# EAGLE board LedBoards (EAGLE 4.16)
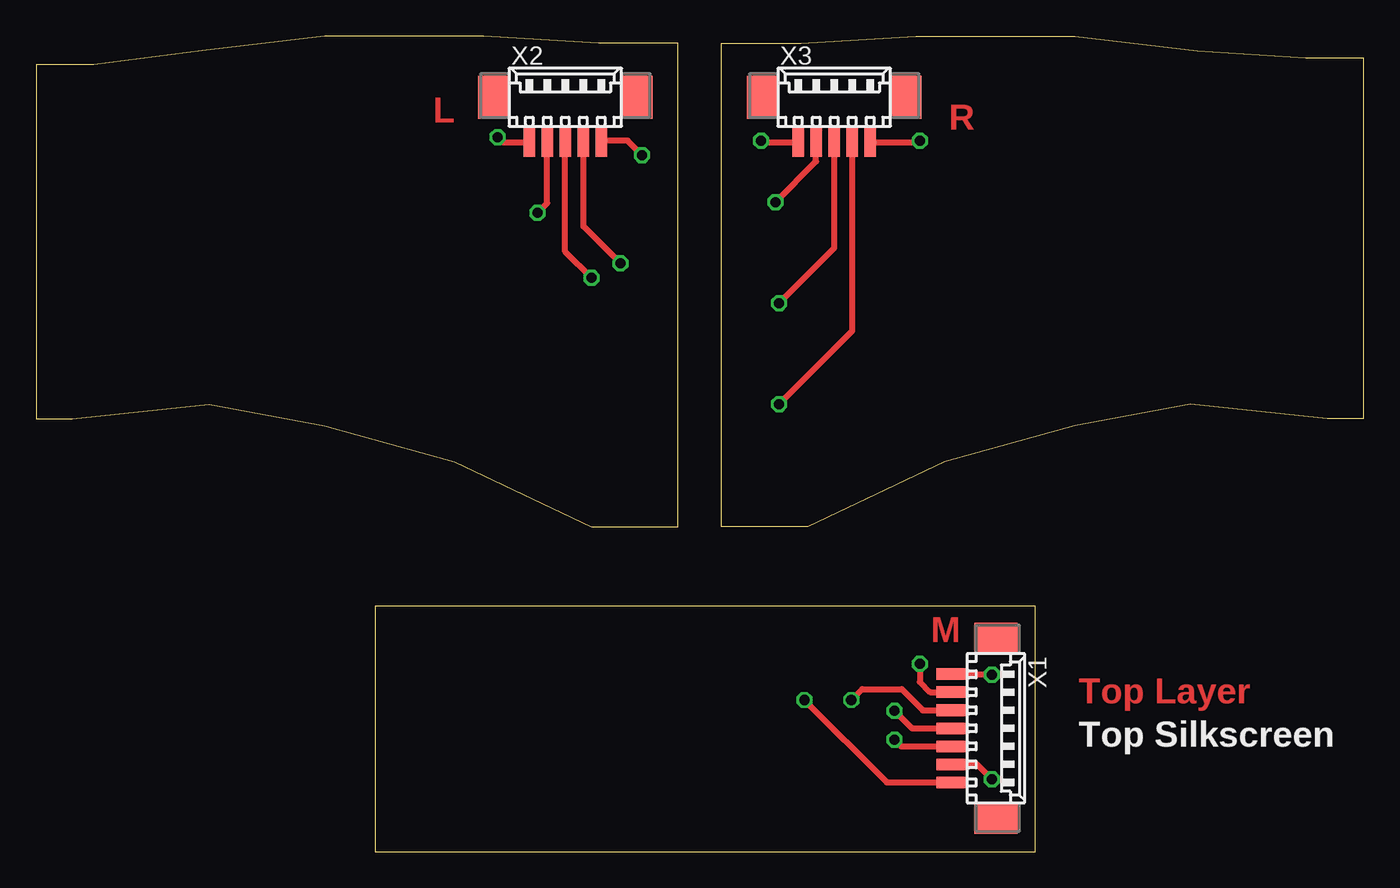
[diagram p0: board, top side]
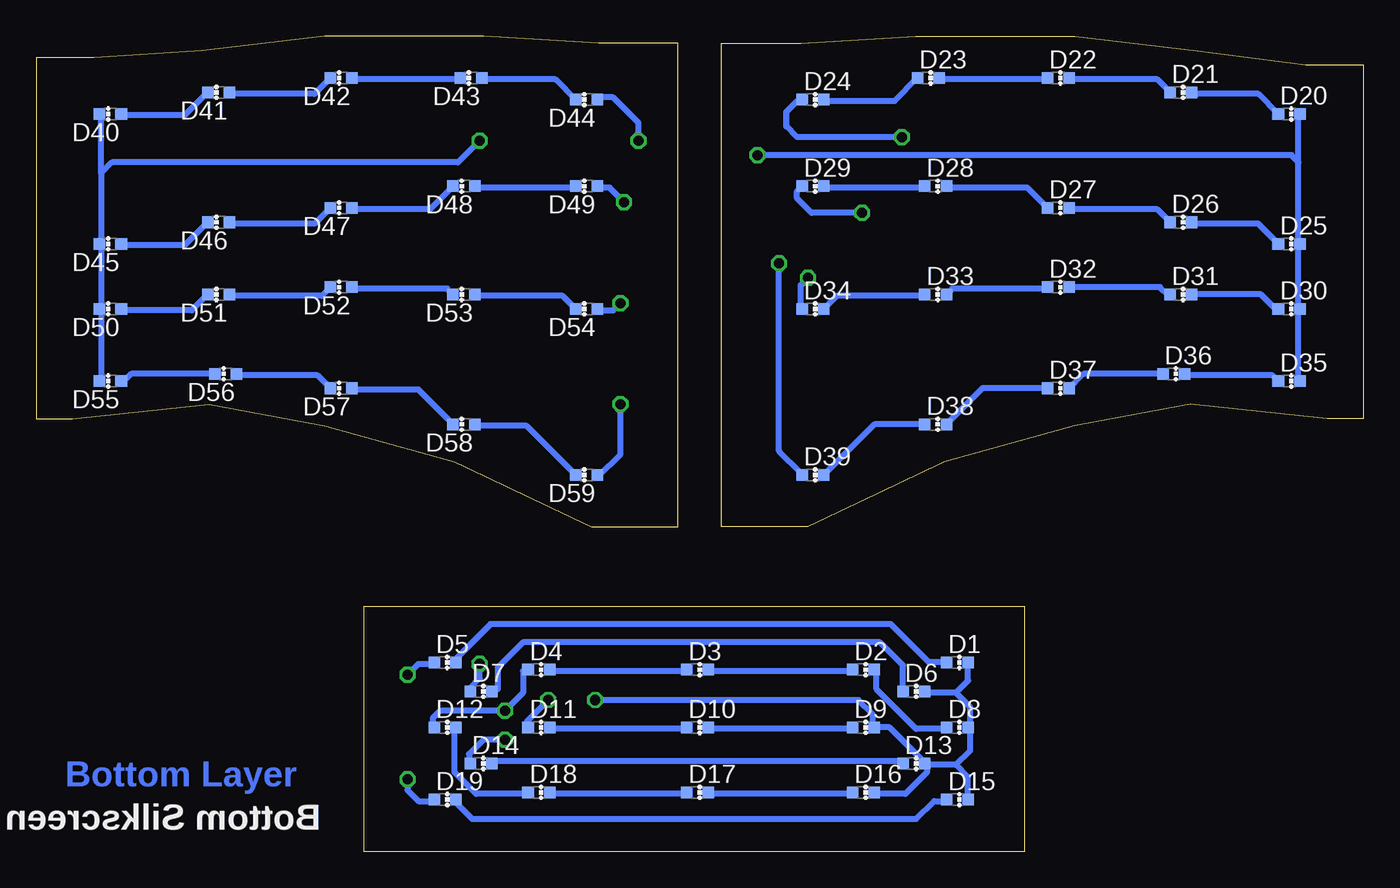
[diagram p1: board, bottom side, seen from below]

Size 92 x 56.5 mm. Coordinates in mm from the lower left corner, seen from the top.
Outline: 0,54.5 0,30 2.5,30 12,31 20,29.5 29,27 38.5,22.5 44.5,22.5 44.5,56 39,56 31,56.5 20,56.5 11.5,55.5 4,54.5 0,54.5
Outline: 92,55 92,30 89.5,30 80,31 72,29.5 63,27 53.5,22.5 47.5,22.5 47.5,56 53,56 61,56.5 72,56.5 80.5,55.5 88,55 92,55
Outline: 23.5,17 23.5,0 69.25,0 69.25,17 23.5,17
Copper layers (1*16): Top 0.035mm / dielectric 1.5mm / Bottom 0.035mm
Design rules "10mils": minimum track width 10mil, minimum drill 24mil, track to track 10mil, track to pad 10mil, pad to pad 10mil, via to via 10mil, smd to smd 10mil, copper to edge 40mil, drill to drill 10mil, minimum pad ring 10mil, minimum via ring 8mil, stop-mask expansion 0mil, vias tented up to drill 0mil, thermal gap 10mil

## Footprints (pad centres in the part's own frame; a part is rotated, then mirrored left to right if it is on the bottom)
CHIP-LED0603 = smd 0.8 x 0.8: A 0,-0.75; C 0,0.75
53261-07 = smd 0.8 x 2: 1 3.75,-2.5; 2 2.5,-2.5; 3 1.25,-2.5; 4 0,-2.5; 5 -1.25,-2.5; 6 -2.5,-2.5; 7 -3.75,-2.5 | smd 2.1 x 3: S1 6.25,0.625; S2 -6.25,0.625
53261-05 = smd 0.8 x 2: 1 2.5,-2.5; 2 1.25,-2.5; 3 0,-2.5; 4 -1.25,-2.5; 5 -2.5,-2.5 | smd 2.1 x 3: S1 5,0.625; S2 -5,0.625

## Placement (x,y rotation side)
D1  [CHIP-LED0603]  28.15,13.1 270 bottom
D2  [CHIP-LED0603]  34.65,12.6 270 bottom
D3  [CHIP-LED0603]  46.15,12.6 270 bottom
D4  [CHIP-LED0603]  57.15,12.6 270 bottom
D5  [CHIP-LED0603]  63.65,13.1 270 bottom
D6  [CHIP-LED0603]  31.15,11.1 270 bottom
D7  [CHIP-LED0603]  61.15,11.1 270 bottom
D8  [CHIP-LED0603]  28.15,8.6 270 bottom
D9  [CHIP-LED0603]  34.65,8.6 270 bottom
D10  [CHIP-LED0603]  46.15,8.6 270 bottom
D11  [CHIP-LED0603]  57.15,8.6 270 bottom
D12  [CHIP-LED0603]  63.65,8.6 270 bottom
D13  [CHIP-LED0603]  31.15,6.1 270 bottom
D14  [CHIP-LED0603]  61.15,6.1 270 bottom
D15  [CHIP-LED0603]  28.15,3.6 270 bottom
D16  [CHIP-LED0603]  34.65,4.1 270 bottom
D17  [CHIP-LED0603]  46.15,4.1 270 bottom
D18  [CHIP-LED0603]  57.15,4.1 270 bottom
D19  [CHIP-LED0603]  63.65,3.6 270 bottom
D20  [CHIP-LED0603]  5.15,51.1 270 bottom
D21  [CHIP-LED0603]  12.65,52.6 270 bottom
D22  [CHIP-LED0603]  21.15,53.6 270 bottom
D23  [CHIP-LED0603]  30.15,53.6 270 bottom
D24  [CHIP-LED0603]  38.15,52.1 270 bottom
D25  [CHIP-LED0603]  5.15,42.1 270 bottom
D26  [CHIP-LED0603]  12.65,43.6 270 bottom
D27  [CHIP-LED0603]  21.15,44.6 270 bottom
D28  [CHIP-LED0603]  29.65,46.1 270 bottom
D29  [CHIP-LED0603]  38.15,46.1 270 bottom
D30  [CHIP-LED0603]  5.15,37.6 270 bottom
D31  [CHIP-LED0603]  12.65,38.6 270 bottom
D32  [CHIP-LED0603]  21.15,39.1 270 bottom
D33  [CHIP-LED0603]  29.65,38.6 270 bottom
D34  [CHIP-LED0603]  38.15,37.6 270 bottom
D35  [CHIP-LED0603]  5.15,32.6 270 bottom
D36  [CHIP-LED0603]  13.15,33.1 270 bottom
D37  [CHIP-LED0603]  21.15,32.1 270 bottom
D38  [CHIP-LED0603]  29.65,29.6 270 bottom
D39  [CHIP-LED0603]  38.15,26.1 270 bottom
D40  [CHIP-LED0603]  86.85,51.1 90 bottom
D41  [CHIP-LED0603]  79.35,52.6 90 bottom
D42  [CHIP-LED0603]  70.85,53.6 90 bottom
D43  [CHIP-LED0603]  61.85,53.6 90 bottom
D44  [CHIP-LED0603]  53.85,52.1 90 bottom
D45  [CHIP-LED0603]  86.85,42.1 90 bottom
D46  [CHIP-LED0603]  79.35,43.6 90 bottom
D47  [CHIP-LED0603]  70.85,44.6 90 bottom
D48  [CHIP-LED0603]  62.35,46.1 90 bottom
D49  [CHIP-LED0603]  53.85,46.1 90 bottom
D50  [CHIP-LED0603]  86.85,37.6 90 bottom
D51  [CHIP-LED0603]  79.35,38.6 90 bottom
D52  [CHIP-LED0603]  70.85,39.1 90 bottom
D53  [CHIP-LED0603]  62.35,38.6 90 bottom
D54  [CHIP-LED0603]  53.85,37.6 90 bottom
D55  [CHIP-LED0603]  86.85,32.6 90 bottom
D56  [CHIP-LED0603]  78.85,33.1 90 bottom
D57  [CHIP-LED0603]  70.85,32.1 90 bottom
D58  [CHIP-LED0603]  62.35,29.6 90 bottom
D59  [CHIP-LED0603]  53.85,26.1 90 bottom
X1  Mouth connector  [53261-07]  65.91,8.54 270 top
X2  Right eye connector  [53261-05]  36.68,51.63 0 top
X3  Left eye connector  [53261-05]  55.32,51.63 0 top

## Library data of the parts
D1-D59 = led
X1-X3 = con-molex

## Nets
GND: D20.C D25.C D30.C D35.C X2.1
GND1: D1.C D6.C D8.C D9.C D13.C D15.C D16.C X1.1
GND2: D40.C D45.C D50.C D55.C X3.1
N$1: D44.A X3.5
N$2: D58.A D59.C
N$3: D57.A D58.C
N$4: D56.A D57.C
N$5: D24.A X2.5
N$6: D38.A D39.C
N$7: D37.A D38.C
N$8: D36.A D37.C
N$9: D35.A D36.C
N$10: D29.A X2.4
N$11: D33.A D34.C
N$12: D32.A D33.C
N$13: D17.A D18.C
N$14: D16.A D17.C
N$15: D12.C D18.A
N$16: D2.A D3.C
N$17: D3.A D4.C
N$18: D4.A D12.A X1.4
N$19: D31.A D32.C
N$20: D30.A D31.C
N$21: D39.A X2.2
N$22: D28.A D29.C
N$23: D27.A D28.C
N$24: D26.A D27.C
N$25: D25.A D26.C
N$26: D34.A X2.3
N$27: D23.A D24.C
N$28: D22.A D23.C
N$29: D21.A D22.C
N$30: D20.A D21.C
N$31: D55.A D56.C
N$32: D49.A X3.4
N$33: D53.A D54.C
N$34: D52.A D53.C
N$35: D51.A D52.C
N$36: D50.A D51.C
N$37: D54.A X3.3
N$38: D48.A D49.C
N$39: D47.A D48.C
N$40: D46.A D47.C
N$41: D45.A D46.C
N$42: D40.A D41.C
N$43: D41.A D42.C
N$44: D42.A D43.C
N$45: D59.A X3.2
N$46: D43.A D44.C
N$47: D2.C D8.A
N$48: D5.A X1.7
N$49: D6.A D7.C
N$50: D7.A X1.6
N$51: D1.A D5.C
N$52: D10.A D11.C
N$53: D19.A X1.2
N$54: D9.A D10.C
N$55: D14.A X1.3
N$56: D15.A D19.C
N$57: D11.A X1.5
N$58: D13.A D14.C

## Tracks (layer width: path | path; a pad name or v marks a point on that pad's centre or on a via)
GND  (via drill 0.7)
  Top 0.406: X2.1 39.25,49.2 39.25,49.25 41,49.25 v42,48.25
  Bottom 0.406: 4.5,42 D25.C 4.5,42 | D20.C 4.5,51 4.5,47.75 | 4.5,42 4.5,47.75 | 4.5,37.5 D30.C 4.5,37.5 | 4.5,37.5 4.5,42 | D35.C 4.5,32.5 4.5,37.5 | v42,48.25 5,48.25 4.5,47.75
GND1  (via drill 0.7)
  Top 0.406: X1.1 58.96,4.79 v53.25,10.5
  Bottom 0.406: D16.C 33.75,4 31.75,4 30.25,5.5 30.25,5.75 D13.C | D13.C 30.4,6.15 30.5,6.25 32.85,8.6 D9.C 33.9,8.65 34,8.75 34,9.5 35,10.5 v53.25,10.5 | D1.C 27.4,11.85 28.25,11 | 28.25,11 27.25,10 27.25,8.75 D8.C 27.3,8.5 27.25,8.5 27.25,7 28.25,6 | D6.C 30.3,11 30.25,11 28.25,11 | D15.C 27.4,5.15 28.25,6 | D13.C 30.3,6 30.25,6 28.25,6
GND2  (via drill 0.7)
  Top 0.406: X3.1 61.25,49.13 v61.25,49.25
  Bottom 0.406: D40.C 87.5,51 87.5,47 | 87.5,47 87.5,42.5 87.5,42.2 D45.C 87.5,42 87.5,37.5 | 87.5,37.5 D50.C 87.5,37.5 | D55.C 87.5,32.5 87.5,37.5 | v61.25,49.25 62.75,47.75 86.75,47.75 87.5,47
N$1  (via drill 0.7)
  Top 0.406: X3.5 50.25,49.13 v50.25,49.25
  Bottom 0.406: v50.25,49.25 50.25,50.5 52,52.25 52.75,52.25 53,52 D44.A
N$2
  Bottom 0.406: D58.A 61.5,29.5 58,29.5 D59.C
N$3
  Bottom 0.406: D57.A 70,32 65.5,32 D58.C
N$4
  Bottom 0.406: D56.A 78,33 72.5,33 D57.C
N$5  (via drill 0.7)
  Top 0.406: X2.5 32.37,49.13 v32,49.5
  Bottom 0.406: v32,49.5 39.25,49.5 40,50.25 40,51.25 39.25,52 39,52 D24.A
N$6
  Bottom 0.406: D39.C 37.5,26 33.9,29.6 D38.A
N$7
  Bottom 0.406: D38.C 29,29.5 26.4,32.1 D37.A
N$8
  Bottom 0.406: D37.C 20.5,32 19.4,33.1 D36.A
N$9
  Bottom 0.406: D36.C 12.5,33 6.3,33 D35.A
N$10  (via drill 0.7)
  Top 0.406: X2.4 35.43,44.93 v34.75,44.25
  Bottom 0.406: v34.75,44.25 38.25,44.25 39.25,45.25 39.25,45.75 39,46 D29.A
N$11
  Bottom 0.406: D33.A 30.5,38.5 36.5,38.5 D34.C
N$12
  Bottom 0.406: D32.A 22,39 28.5,39 D33.C
N$13
  Bottom 0.406: D17.A 47.25,4 56.25,4 D18.C
N$14
  Bottom 0.406: D16.A 35.75,4 45,4 D17.C
N$15
  Bottom 0.406: D18.A 58.25,4 61.5,4 63,5.5 63,8.25 D12.C
N$16
  Bottom 0.406: D2.A 35.75,12.5 45.25,12.5 D3.C
N$17
  Bottom 0.406: D3.A 47.25,12.5 56,12.5 D4.C
N$18  (via drill 0.7)
  Top 0.406: X1.4 60.71,8.54 v59.5,9.75
  Bottom 0.406: D12.A 64.4,8.65 64.5,8.75 64.5,9.25 64,9.75 v59.5,9.75 58.25,11 58.25,12.5 58,12.5 D4.A
N$19
  Bottom 0.406: D31.A 13.5,38.5 14.1,39.1 D32.C
N$20
  Bottom 0.406: D30.A 6,37.5 7.1,38.6 D31.C
N$21  (via drill 0.7)
  Top 0.406: X2.2 37.93,43.32 v40.5,40.75
  Bottom 0.406: D39.A 38.9,26.15 39,26.25 40.5,27.75 v40.5,40.75
N$22
  Bottom 0.406: D29.C 37.5,46 30.5,46 D28.A
N$23
  Bottom 0.406: D28.C 29,46 23.3,46 D27.A
N$24
  Bottom 0.406: D27.C 20.5,44.5 14.3,44.5 D26.A
N$25
  Bottom 0.406: D26.C 11.8,43.5 11.5,43.5 7.3,43.5 D25.A
N$26  (via drill 0.7)
  Top 0.406: X2.3 36.68,41.57 v38.5,39.75
  Bottom 0.406: D34.A 39,37.7 39,37.75 39,39.25 v38.5,39.75
N$27
  Bottom 0.406: D24.C 37.5,52 32.5,52 D23.A
N$28
  Bottom 0.406: D23.C 29.5,53.5 22,53.5 D22.A
N$29
  Bottom 0.406: D22.C 20.5,53.5 14.3,53.5 D21.A
N$30
  Bottom 0.406: D21.C 11.8,52.5 11.5,52.5 7.3,52.5 D20.A
N$31
  Bottom 0.406: D55.A 86,32.5 85.4,33.1 D56.C
N$32  (via drill 0.7)
  Top 0.406: X3.4 54.07,47.82 v51.25,45
  Bottom 0.406: D49.A 53,46 52.75,46 52.25,46 v51.25,45
N$33
  Bottom 0.406: D53.A 61.5,38.5 55.5,38.5 D54.C
N$34
  Bottom 0.406: D52.A 70,39 63.5,39 D53.C
N$35
  Bottom 0.406: D51.A 78.5,38.5 72.2,38.5 D52.C
N$36
  Bottom 0.406: D50.A 86,37.5 81.2,37.5 D51.C
N$37  (via drill 0.7)
  Top 0.406: X3.3 55.32,41.82 v51.5,38
  Bottom 0.406: D54.A 53,37.5 52,37.5 v51.5,38
N$38
  Bottom 0.406: D48.A 61.5,46 54.7,46 D49.C
N$39
  Bottom 0.406: D47.A 70,44.5 64.7,44.5 D48.C
N$40
  Bottom 0.406: D46.A 78.5,43.5 72.7,43.5 D47.C
N$41
  Bottom 0.406: D45.A 86,42 81.7,42 D46.C
N$42
  Bottom 0.406: D40.A 86,51 81.7,51 D41.C
N$43
  Bottom 0.406: D41.A 78.5,52.5 72.7,52.5 D42.C
N$44
  Bottom 0.406: D42.A 70,53.5 62.7,53.5 D43.C
N$45  (via drill 0.7)
  Top 0.406: X3.2 56.57,36.07 v51.5,31
  Bottom 0.406: D59.A 53,26 51.5,27.5 v51.5,31
N$46
  Bottom 0.406: D43.A 61,53.5 56,53.5 D44.C
N$47
  Bottom 0.406: D8.A 29.25,8.5 31,8.5 33.75,11.25 33.75,12.25 D2.C
N$48  (via drill 0.7)
  Top 0.406: X1.7 66.29,12.29 v66.25,12.25
  Bottom 0.406: D5.A 64.5,13 64.75,13 65.5,13 v66.25,12.25
N$49
  Bottom 0.406: D6.A 31.9,12.9 33.5,14.5 58.25,14.5 60,12.75 60,11.25 60.15,11.15 D7.C
N$50  (via drill 0.7)
  Top 0.406: X1.6 61.96,11.04 61.25,11.75 v61.25,13
  Bottom 0.406: D7.A 61.9,11.15 62,11.25 61.25,12 v61.25,13
N$51
  Bottom 0.406: D1.A 30.1,13.1 32.75,15.75 60.5,15.75 63,13.25 62.9,13.15 D5.C
N$52
  Bottom 0.406: D10.A 47.25,8.5 56.25,8.5 D11.C
N$53  (via drill 0.7)
  Top 0.406: X1.2 65.21,6.04 v66.25,5
  Bottom 0.406: v66.25,5 66.25,4.25 65.5,3.5 64.5,3.5 D19.A
N$54
  Bottom 0.406: D9.A 35.75,8.5 45.25,8.5 D10.C
N$55  (via drill 0.7)
  Top 0.406: X1.3 59.96,7.29 v59.5,7.75
  Bottom 0.406: v59.5,7.75 61,7.75 62,6.75 62,6.25 61.9,6.15 D14.A
N$56
  Bottom 0.406: D15.A 29.25,3.5 29.75,3.5 31,2.25 61.75,2.25 63,3.5 D19.C
N$57  (via drill 0.7)
  Top 0.406: X1.5 61.46,9.79 60,11.25 57.25,11.25 v56.5,10.5
  Bottom 0.406: D11.A 58,8.7 58,8.75 58,9 v56.5,10.5
N$58
  Bottom 0.406: D13.A 32,6.25 60.25,6.25 D14.C

## Text on the board
Top: L | R | M | Top Layer
Bottom: Bottom Layer
Vias: Vias
Holes: Holes
_tplace: Top Silkscreen
_bplace: Bottom Silkscreen